# EAGLE board untitled (EAGLE 9.6.2)
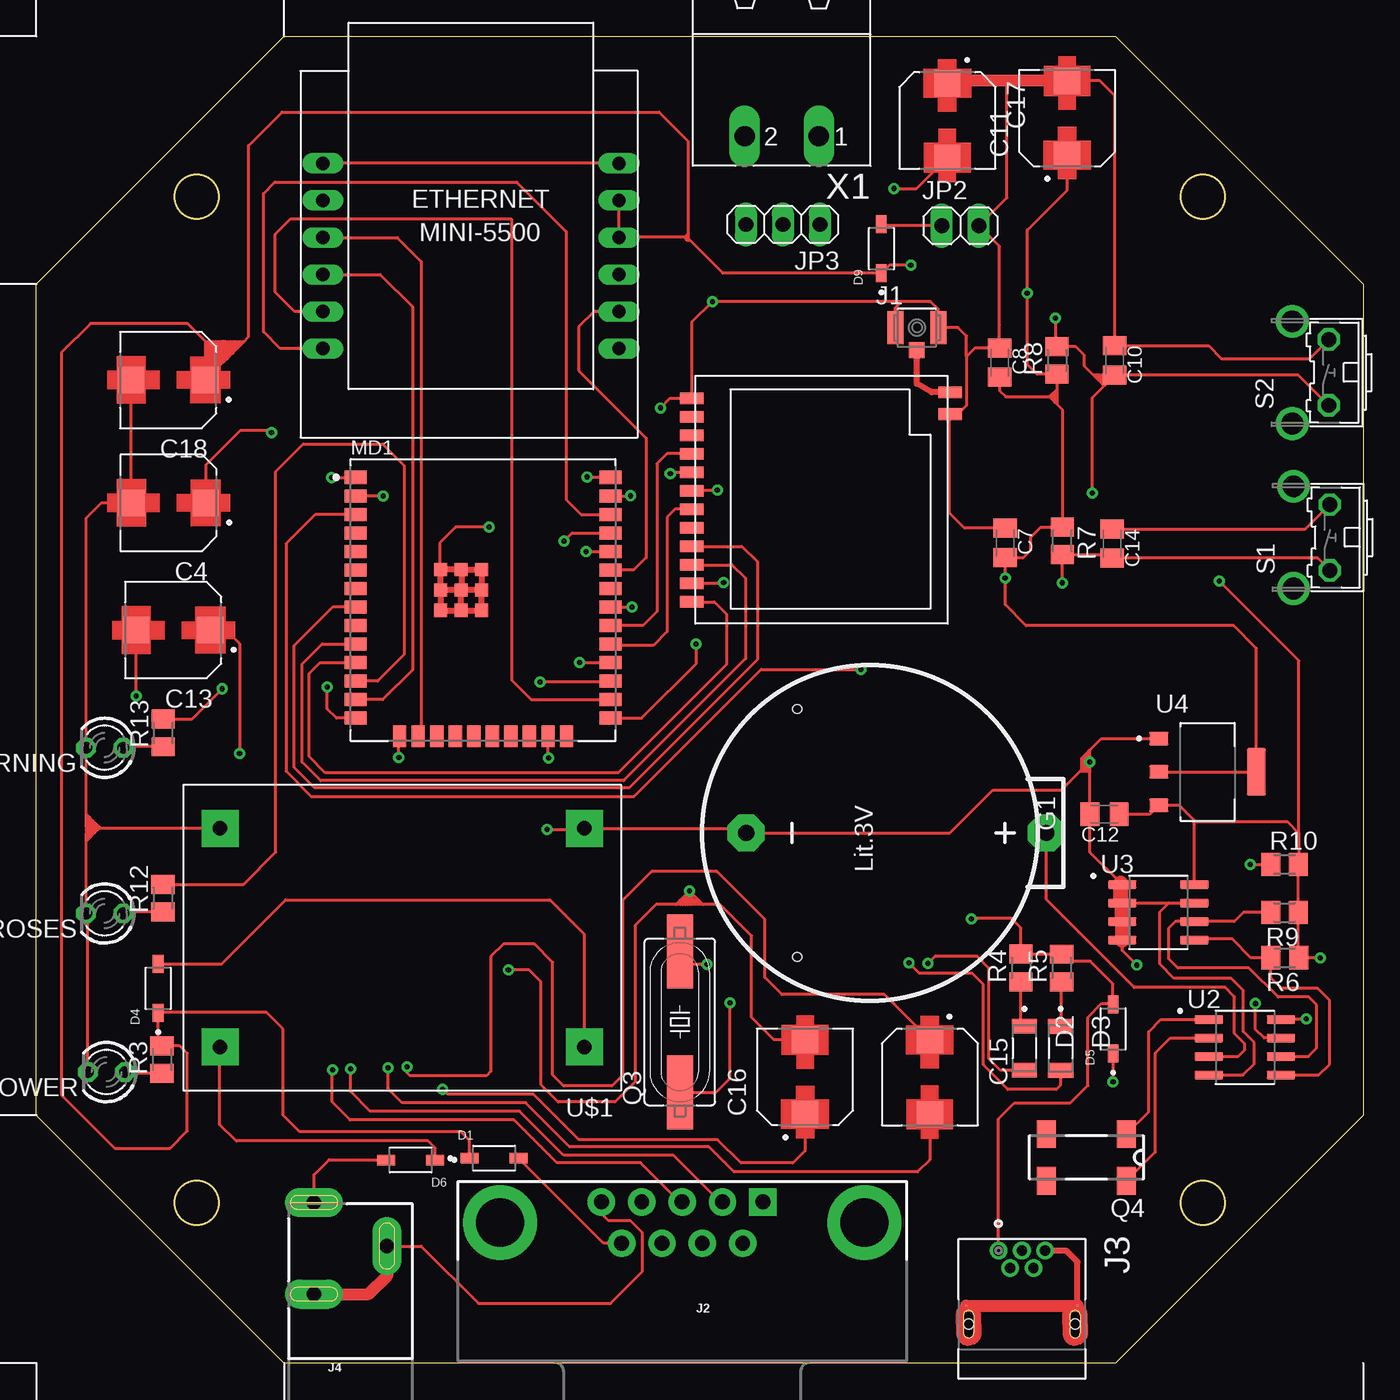
[diagram p0: board, top side]
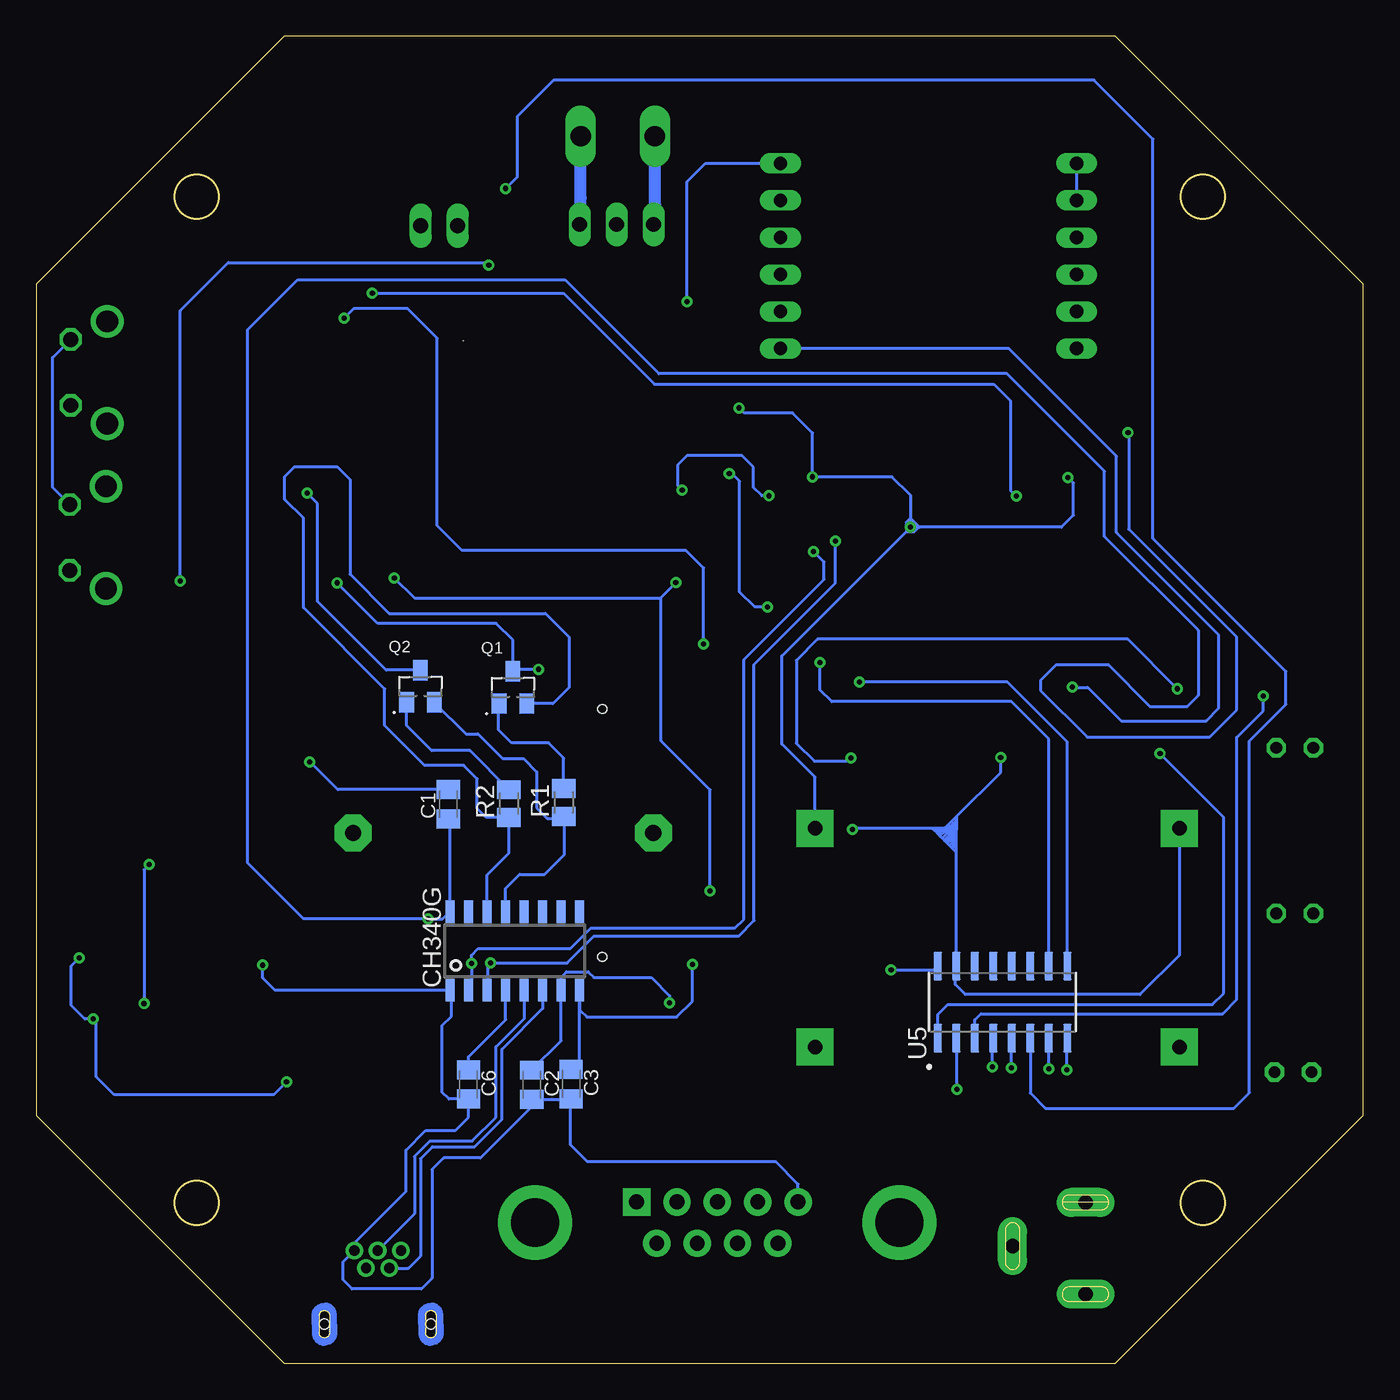
[diagram p1: board, bottom side, seen from below]

Size 91 x 91 mm. Coordinates in mm from the lower left corner, seen from the top.
Outline: 0,74 17,91 74,91 91,74 91,17 74,0 17,0 0,17 0,74
Outline: circle at 11,11 radius 1.5
Outline: circle at 80,11 radius 1.5
Outline: circle at 11,80 radius 1.5
Outline: circle at 80,80 radius 1.5
Copper layers (1*16): Top 0.035mm / dielectric 1.5mm / Bottom 0.035mm
Design rules "default": minimum track width 6mil, minimum drill 0.35mm, track to track 6mil, track to pad 6mil, pad to pad 6mil, via to via 6mil, smd to smd 6mil, copper to edge 40mil, drill to drill 6mil, minimum pad ring 10mil, minimum via ring 8mil, stop-mask expansion 4mil, vias tented up to drill 0mil, thermal gap 10mil
Net classes: 0 default: clearance 0.2 mm

## Footprints (pad centres in the part's own frame; a part is rotated, then mirrored left to right if it is on the bottom)
C0805K = smd 1.3 x 1.6: 1 -1,0; 2 1,0
CAP_EEEFK1H100V = smd 1.8 x 1.8: 1 -2.55,0; 2 2.55,0
SOD3715X145N = smd 1.21 x 0.73: A 1.68,0; C -1.68,0
LEDC3216X120N = smd 1.01 x 1.73: + -1.51,0; - 1.51,0
CR2032H = drill 1.118 pad 2.54 octagon: + 0,12.1; - 0,-8.5 | hole 0.6: -8.5,-5; 8.5,-5
HRS_U.FL-R-SMT(01) = smd 1.1 x 2.25: 1 -1.475,0; 2 1.475,0 | smd 1.05 x 1.1: 3 0,-1.55
DB9 = drill 1.016 pad 1.88 square: 1 -5.54,-1.42 | drill 1.016 pad 1.88: 2 -2.77,-1.42; 3 0,-1.42; 4 2.77,-1.42; 5 5.54,-1.42; 6 -4.15,1.42; 7 -1.38,1.42; 8 1.38,1.42; 9 4.15,1.42 | drill 3.302 pad 5.08: G1 -12.5,0; G2 12.5,0
TE_2172034-1 = drill 0.7: 1 -5.05,-1.6; 2 -3.85,-0.8; 3 -5.05,0; 4 -3.85,0.8; 5 -5.05,1.6 | smd 0.1 x 0.1: SH1 -1.27,3.81; SH2 -1.27,-3.81 | hole 0.7: 0,3.65; 0,-3.65
POWER_JACK_SLOT = drill 1 pad 2 long: GND@1 2.58,7.5; GND@2 7.58,10.8; PWR 2.58,13.8
1X02 = drill 1.016 long: 1 -1.27,0; 2 1.27,0
1X03 = drill 1.016 long: 1 -2.54,0; 2 0,0; 3 2.54,0
LORA-NICERF-V2 = smd 1.6 x 0.8: ANT 9.17,6.81; DIO0 -8.57,-5.03; DIO1 -8.57,-3.76; DIO2 -8.57,-2.49; GND -8.57,6.4; GND1 9.17,5.31; MISO -8.57,1.32; MOSI -8.57,0.05; NC -8.57,5.13; NC1 -8.57,3.86; NRST -8.57,-7.57; NSS -8.57,-1.22; SCK -8.57,2.59; VCC -8.57,-6.3
ESPRESSIF_SYSTEMS_ESP32-WROOM-32U_16MB_0 = smd 1.5 x 0.9: 1 -8.75,8.41; 2 -8.75,7.14; 3 -8.75,5.87; 4 -8.75,4.6; 5 -8.75,3.33; 6 -8.75,2.06; 7 -8.75,0.79; 8 -8.75,-0.48; 9 -8.75,-1.75; 10 -8.75,-3.02; 11 -8.75,-4.29; 12 -8.75,-5.56; 13 -8.75,-6.83; 14 -8.75,-8.1; 25 8.75,-8.1; 26 8.75,-6.83; 27 8.75,-5.56; 28 8.75,-4.29; 29 8.75,-3.02; 30 8.75,-1.75; 31 8.75,-0.48; 32 8.75,0.79; 33 8.75,2.06; 34 8.75,3.33; 35 8.75,4.6; 36 8.75,5.87; 37 8.75,7.14; 38 8.75,8.41 | smd 0.9 x 1.5: 15 -5.71,-9.35; 16 -4.44,-9.35; 17 -3.17,-9.35; 18 -1.9,-9.35; 19 -0.63,-9.35; 20 0.64,-9.35; 21 1.91,-9.35; 22 3.18,-9.35; 23 4.45,-9.35; 24 5.72,-9.35 | smd 0.9 x 0.9: 39 -2.9,2.09; 39-2 -1.5,0.69; 39-3 -1.5,2.09; 39-4 -0.1,2.09; 39-5 -0.1,-0.71; 39-6 -1.5,-0.71; 39-7 -2.9,-0.71; 39-8 -0.1,0.69; 39-9 -2.9,0.69
LED3MM = drill 0.813 octagon: A -1.27,0; K 1.27,0
SOT95P240X120-3N = smd 1 x 1.4: 1 -0.95,-1.1; 2 0.95,-1.1; 3 0,1.1
SM49 = smd 5.08 x 1.778: 1 -4.826,0; 2 4.826,0
MC-306 = smd 1.3 x 1.9: 1 -2.75,-1.6; 2 2.75,-1.6; 3 2.75,1.6; 4 -2.75,1.6
M0805 = smd 1.3 x 1.6: 1 -0.95,0; 2 0.95,0
B3F-31XX = drill 1.016 octagon: 1 -2.261,-1.245; 2 2.261,-1.245 | drill 1.499 pad 2.159: 3 -3.505,1.245; 4 3.505,1.245
SOIC127P600X175-8N = smd 1.97 x 0.59: 1 -2.475,1.905; 2 -2.475,0.635; 3 -2.475,-0.635; 4 -2.475,-1.905; 5 2.475,-1.905; 6 2.475,-0.635; 7 2.475,0.635; 8 2.475,1.905
SOT229P700X180-4N = smd 1.31 x 0.93: 1 -3.345,2.29; 2 -3.345,0; 3 -3.345,-2.29 | smd 1.31 x 3.24: 4 3.345,0
SOIC127P600X175-16N = smd 1.97 x 0.59: 1 -2.475,4.445; 2 -2.475,3.175; 3 -2.475,1.905; 4 -2.475,0.635; 5 -2.475,-0.635; 6 -2.475,-1.905; 7 -2.475,-3.175; 8 -2.475,-4.445; 9 2.475,-4.445; 10 2.475,-3.175; 11 2.475,-1.905; 12 2.475,-0.635; 13 2.475,0.635; 14 2.475,1.905; 15 2.475,3.175; 16 2.475,4.445
STEPDOWN_SY8205 = drill 1 pad 2.54 square: IN_GND 18,-2.5; IN_VCC 3,-2.5; OUT_GND 18,-27.5; OUT_VCC 3,-27.5
SOIC16 = smd 0.635 x 1.524: 1 -4.445,-2.695; 2 -3.175,-2.695; 3 -1.905,-2.695; 4 -0.635,-2.695; 5 0.635,-2.695; 6 1.905,-2.695; 7 3.175,-2.695; 8 4.445,-2.695; 9 4.445,2.695; 10 3.175,2.695; 11 1.905,2.695; 12 0.635,2.695; 13 -0.635,2.695; 14 -1.905,2.695; 15 -3.175,2.695; 16 -4.445,2.695
MINI_W5500 = drill 0.914 long: 3V3 21.844,-8.89; 3V3.2 21.844,-11.43; CS 1.524,-16.51; GND 1.524,-6.35; GND.2 1.524,-8.89; GND.3 21.844,-6.35; INT 1.524,-19.05; MISO 21.844,-19.05; MOSI 1.524,-11.43; NC 21.844,-13.97; RST 21.844,-16.51; SCLK 1.524,-13.97
MSTBA2 = drill 1.397 long: 1 -2.54,5.08; 2 2.54,5.08

## Placement (x,y rotation side)
C1  1uF  [C0805K]  62.74,38.33 90 bottom
C2  22pF  [C0805K]  57.03,19.09 270 bottom
C3  22pF  [C0805K]  54.33,19.14 270 bottom
C4  10uf/50V  [CAP_EEEFK1H100V]  9.06,59.01 180 top
C6  100nF  [C0805K]  61.36,19.11 270 bottom
C7  10uF  [C0805K]  66.44,56.26 270 top
C8  100nF  [C0805K]  66.06,68.62 270 top
C10  100nF  [C0805K]  73.96,68.78 270 top
C11  10uf/50V  [CAP_EEEFK1H100V]  70.7,85.4 90 top
C12  1uF  [C0805K]  73.27,37.64 180 top
C13  10uf/50V  [CAP_EEEFK1H100V]  9.39,50.28 180 top
C14  100nF  [C0805K]  73.79,56.21 270 top
C15  10uf/50V  [CAP_EEEFK1H100V]  61.28,19.62 270 top
C16  10uf/50V  [CAP_EEEFK1H100V]  52.72,19.63 90 top
C17  10uf/50V  [CAP_EEEFK1H100V]  62.49,85.23 270 top
C18  10uf/50V  [CAP_EEEFK1H100V]  9.04,67.43 180 top
D1  1N5819HW-7  [SOD3715X145N]  31.39,14.05 0 top
D2  Tx  [LEDC3216X120N]  67.76,21.6 270 top
D3  Rx  [LEDC3216X120N]  70.25,21.59 270 top
D4  1N5819HW-7  [SOD3715X145N]  8.35,25.7 90 top
D5  1N5819HW-7  [SOD3715X145N]  73.85,22.92 90 top
D6  1N5819HW-7  [SOD3715X145N]  25.67,13.93 180 top
D9  1N5819HW-7  [SOD3715X145N]  57.96,76.44 90 top
G1  CR2032H  [CR2032H]  57.18,36.36 270 top
J1  U.FL-R-SMT(01)  [HRS_U.FL-R-SMT(01)]  60.39,71.02 0 top
J2  [DB9]  44.29,9.63 180 top
J3  2172034-1  [TE_2172034-1]  67.6,2.67 270 top
J4  POWER_JACKSLT  [POWER_JACK_SLOT]  16.46,-2.78 0 top
JP2  [1X02]  63.38,78.01 0 top
JP3  [1X03]  51.2,78.11 180 top
LORA-NICERF-V1  [LORA-NICERF-V2]  53.51,59.78 0 top
MD1  ESPRESSIF_SYSTEMS_ESP32-WROOM-32U_16MBESPRESSIF_SYSTEMS_ESP32-WROOM-32U_16MB_0_0  [ESPRESSIF_SYSTEMS_ESP32-WROOM-32U_16MB_0]  30.63,52.34 0 top
POWER  TLLY4400  [LED3MM]  4.8,19.96 180 top
PROSES  TLLY4400  [LED3MM]  4.68,30.84 180 top
Q1  MMBT3904  [SOT95P240X120-3N]  58.32,46.34 0 bottom
Q2  MMBT3904  [SOT95P240X120-3N]  64.66,46.42 0 bottom
Q3  12MHz  [SM49]  44.14,23.4 90 top
Q4  MC-306  [MC-306]  72.02,14.11 180 top
R1  10K  [M0805]  54.83,38.45 90 bottom
R2  10K  [M0805]  58.59,38.38 90 bottom
R3  1K  [M0805]  8.61,20.81 90 top
R4  1K  [M0805]  67.53,27.11 90 top
R5  1K  [M0805]  70.32,27.1 90 top
R6  10K  [M0805]  85.64,27.81 180 top
R7  10K  [M0805]  70.37,56.39 270 top
R8  10K  [M0805]  70,68.77 90 top
R9  10K  [M0805]  85.62,30.91 180 top
R10  10K  [M0805]  85.61,34.2 0 top
R12  1K  [M0805]  8.67,31.89 90 top
R13  1K  [M0805]  8.69,43.23 90 top
S1  [B3F-31XX]  87.47,56.63 90 top
S2  [B3F-31XX]  87.4,67.95 90 top
U2  DS1307Z+  [SOIC127P600X175-8N]  82.9,21.66 0 top
U3  MAX3444EASA  [SOIC127P600X175-8N]  76.95,30.92 0 top
U4  AMS1117  [SOT229P700X180-4N]  80.34,40.55 0 top
U5  MAX232CSE  [SOIC127P600X175-16N]  24.73,24.76 90 bottom
U$1  STEPDOWN_SY8205  [STEPDOWN_SY8205]  10.09,18.68 90 top
U$2  CH340G  [SOIC16]  58.18,28.27 0 bottom
U$3  MINI_W5500  [MINI_W5500]  18.12,88.64 0 top
WARNING  TLLY4400  [LED3MM]  4.68,42.21 180 top
X1  MSTBA2  [MSTBA2]  51.12,89.24 180 top

## Library data of the parts
C1-C3 C6-C8 C10 C12 C14 = rcl; SPICEPREFIX: C
C4 C11 C13 C15-C18 = EEEFK1H100V; AVAILABILITY: In Stock; DESCRIPTION: CAP ALUM 10UF 20% 50V SMD; MF: Panasonic; MP: EEEFK1H100V; PACKAGE: RADIAL-2 Panasonic; PRICE: None; PURCHASE-URL: https://pricing.snapeda.com/search/part/EEEFK1H100V/?ref=eda
D1 D4-D6 D9 = 1N5819HW-7; AVAILABILITY: In Stock; DESCRIPTION: Diode Schottky 40 V 1A Surface Mount SOD-123; MF: Diodes Inc.; MP: 1N5819HW-7; PACKAGE: SOD-123 Fairchild Semiconductor; PRICE: None; PURCHASE-URL: https://pricing.snapeda.com/search/part/1N5819HW-7/?ref=eda
D2 D3 = LHN974_RED_LED_1206; AVAILABILITY: Not in stock; DESCRIPTION: 2.6 V Red LED SMD; MF: Osram; MP: LHN974 RED LED 1206; PACKAGE: None; PRICE: None
G1 = battery_cr2032
J1 = U.FL-R-SMT_01_; AVAILABILITY: In Stock; DESCRIPTION: U.FL (UMCC) Connector Receptacle, Male Pin 50Ohm Surface Mount Solder. RF Connectors / Coaxial Connectors; MF: Hirose; MP: U.FL-R-SMT(01); PACKAGE: None; PRICE: None; PURCHASE-URL: https://pricing.snapeda.com/search/part/U.FL-R-SMT(01)/?ref=eda
J2 = SparkFun-Connectors; PROD_ID: CONN-08194
J3 = 2172034-1; AVAILABILITY: In Stock; COMMENT: 2172034-1; DESCRIPTION: Conn Mini USB Type B RCP 5 POS 0.8mm Solder RA Thru-Hole 5 Terminal 1 Port Box/Tray; EU_ROHS_COMPLIANCE: Compliant; MF: TE Connectivity; MP: 2172034-1; PACKAGE: None; PRICE: None; PURCHASE-URL: https://pricing.snapeda.com/search/part/2172034-1/?ref=eda
J4 = SparkFun-Connectors; PROD_ID: PRT-00119
JP2 JP3 = pinhead
LORA-NICERF-V1 = LORA-NICERF-V2
MD1 = Espressif Systems - ESP32-WROOM-32U (16MB); AUTOMOTIVE: No; BANDWIDTH: 72MHz; CENTROID_NOT_SPECIFIED: No; DATASHEET: https://www.espressif.com/sites/default/files/documentation/esp32-wroom-32d_esp32-wroom-32u_datasheet_en.pdf; DATA_RATE: 150Mbits/s; DEVICE_CLASS_L1: Integrated Circuits (ICs); DEVICE_CLASS_L2: RF Semiconductors and Devices; DEVICE_CLASS_L3: Transceivers; DIGIKEY_DESCRIPTION: RX TXRX MODULE WIFI U.FL SMD; DIGIKEY_PART_NUMBER: 1904-1028-1-ND; FOOTPRINT_VARIANT_NAME_0: Recommended_Land_Pattern; HEIGHT: 3.35mm; INTERFACE: I2C,SPI,UART,Ethernet,I2S,Other; LEAD_FREE: Yes; MAX_FREQUENCY: 2484MHz; MAX_SUPPLY_VOLTAGE: 3.6V; MF: Espressif Systems; MFG_PACKAGE_IDENT: 0; MFG_PACKAGE_IDENT_DATE: 0; MFG_PACKAGE_IDENT_REV: 0; MIN_SUPPLY_VOLTAGE: 3V; MOUSER_PART_NUMBER: 356-ES32WROOM32U16MB; MPN: ESP32-WROOM-32U (16MB); NOMINAL_SUPPLY_CURRENT: 0.5A; NUMBER_OF_ADC_CHANNELS: 16; NUMBER_OF_GPIO: 26; PACKAGE: BT_MODULE; PREFIX: MD; ROHS: Yes; SENSITIVITY: -98dBm; TEMPERATURE_RANGE_HIGH: +85°C; TEMPERATURE_RANGE_LOW: -40°C; VERIFICATION_VERSION: 0.0.0.3
POWER PROSES WARNING = led; MF: VISHAY SEMICONDUCTOR; OC_FARNELL: 1612439
Q1 Q2 = MMBT3904; AVAILABILITY: Not in stock; DESCRIPTION: SMD Transistor MMBT3904 SOT-23 SMD DIOTEC; MF: STMicroelectronics; MP: MMBT3904; PACKAGE: SOT-23 ON; PRICE: None
Q3 = adafruit; OC_FARNELL: unknown; OC_NEWARK: unknown
Q4 = crystal; MPN: MC-306 60.0KHZ 100PPM ,12.5PF; OC_FARNELL: 1278040; OC_NEWARK: 31M5576
R1-R10 R12 R13 = adafruit
S1 S2 = switch-omron; MPN: B3F-3100; OC_FARNELL: 959704; OC_NEWARK: 36M3582
U2 = DS1307Z_; AVAILABILITY: In Stock; DESCRIPTION: Real Time Clock (RTC) IC Clock/Calendar 56B I²C, 2-Wire Serial 8-SOIC (0.154, 3.90mm Width); MF: Maxim Integrated; MP: DS1307Z; PACKAGE: SOIC-8 Maxim; PRICE: None; PURCHASE-URL: https://pricing.snapeda.com/search/part/DS1307Z/?ref=eda
U3 = MAX3444EASA; AVAILABILITY: In Stock; DESCRIPTION: Interface IC - transceivers Maxim Integrated MAX3444EASA+ J1708 1/1 SOIC 8 N; MF: Maxim Integrated; MP: MAX3444EASA+; PACKAGE: SOIC-8 Maxim; PRICE: None; PURCHASE-URL: https://pricing.snapeda.com/search/part/MAX3444EASA+/?ref=eda
U4 = AMS1117; AVAILABILITY: Not in stock; DESCRIPTION: 1A LOW DROPOUT VOLTAGE REGULATOR SOT-223; MF: Advanced Monolithic Systems; MP: AMS1117; PACKAGE: SOT-223 Seeed Technology; PRICE: None
U5 = MAX232CSE; AVAILABILITY: In Stock; DESCRIPTION: 2/2 Transceiver Full RS232 16-SOIC; MF: Maxim Integrated; MP: MAX232CSE; PACKAGE: SOIC-16 Maxim Integrated; PRICE: None; PURCHASE-URL: https://pricing.snapeda.com/search/part/MAX232CSE/?ref=eda
U$1 = STEPDOWN_SY8205
U$2 = usb-serial
U$3 = ethernet-mikroavr
X1 = con-phoenix-508; MF: FARNELL; MPN: 1757242; OC_FARNELL: 3705171; OC_NEWARK: 71C4161

## Nets
3V3: C7.2 C8.2 C11.1 C16.2 LORA-NICERF-V1.VCC MD1.2 R7.1 R8.1 U4.2 U4.4 U5.16
ANT: J1.3 LORA-NICERF-V1.ANT
CLK: MD1.20
CMD: MD1.19
DTR: Q2.2 R1.1 U$2.13
EN: C14.2 MD1.3 Q1.3 R7.2 S1.1
GND: C1.2 C2.2 C3.2 C4.2 C6.2 C7.1 C8.1 C10.1 C11.2 C12.2 C14.1 C17.1 C18.2 G1.- J1.1 J1.2 J2.5 J3.5 J3.SH1 J3.SH2 J4.GND@1 J4.GND@2 JP2.2 LORA-NICERF-V1.GND LORA-NICERF-V1.GND1 MD1.1 MD1.15 MD1.38 MD1.39 MD1.39-2 MD1.39-3 MD1.39-4 MD1.39-5 MD1.39-6 MD1.39-7 MD1.39-8 MD1.39-9 POWER.K PROSES.K S1.2 S2.2 U2.4 U3.1 U3.2 U3.3 U3.4 U3.7 U4.1 U5.15 U$1.IN_GND U$1.OUT_GND U$2.1 U$3.GND U$3.GND.2 U$3.GND.3 WARNING.K
INT_LAN: MD1.36 U$3.INT
IO0: C10.2 MD1.25 Q2.3 R8.2 S2.1
IO34: MD1.6
IO35: MD1.7
LED_PROSES: MD1.12 R12.2
LED_WARNING: MD1.23 R13.2
LORA_DI0: LORA-NICERF-V1.DIO0 MD1.10
LORA_DI1: LORA-NICERF-V1.DIO1 MD1.8
MISO_HSPI: MD1.14 U$3.MISO
MISO_VSPI: LORA-NICERF-V1.MOSI MD1.37
MOSI_HSPI: MD1.16 U$3.MOSI
MOSI_VSPI: LORA-NICERF-V1.MISO MD1.31
N$1: C2.1 Q3.1 U$2.7
N$2: C3.1 Q3.2 U$2.8
N$3: POWER.A R3.1
N$4: Q1.1 R1.2
N$5: Q2.1 R2.2
N$6: Q4.1 U2.1
N$7: Q4.4 U2.2
N$8: D2.+ R4.1
N$9: D3.+ R5.1
N$10: C13.1 U5.1
N$11: D4.A U$1.OUT_VCC
N$12: C6.1 U$2.4
N$13: JP3.1 X1.1
N$14: C13.2 U5.3
N$15: G1.+ U2.3
N$16: JP3.3 X1.2
N$17: D9.A JP2.1
N$18: R10.1 U2.7
N$19: C15.1 U5.4
N$20: D1.A J2.9
N$23: D6.A J4.PWR
N$24: C15.2 U5.5
N$25: PROSES.A R12.1
N$26: C16.1 U5.2
N$27: C17.2 U5.6
N$28: R13.1 WARNING.A
NC: MD1.32
OUT+: C12.1 C18.1 D1.C D4.C D5.C D9.C R3.2 R6.1 R9.1 R10.2 U2.8 U3.8 U4.3 U$3.3V3 U$3.3V3.2
R2IN: J2.3 U5.8
RST_LAN: MD1.33 U$3.RST
RST_LORA: LORA-NICERF-V1.NRST MD1.11
RTS: Q1.2 R2.1 U$2.14
RX: D3.- MD1.35 U$2.3
RX_DB9: MD1.27 U5.9
SCK_HSPI: MD1.13 U$3.SCLK
SCK_VSPI: LORA-NICERF-V1.SCK MD1.30
SCL: R9.2 U2.6 U3.6
SD0: MD1.21
SD1: MD1.22
SD2: MD1.17
SD3: MD1.18
SDA: R6.2 U2.5 U3.5
SENSOR_VN: MD1.5
SENSOR_VP: MD1.4
SS_LAN_CONV: MD1.26 U$3.CS
SS_LORA: LORA-NICERF-V1.NSS MD1.29
T2OUT: J2.2 U5.7
TX: D2.- MD1.34 U$2.2
TX_DB9: MD1.28 U5.10
USB_N: J3.2 U$2.6
USB_P: J3.3 U$2.5
VCC: C1.1 C4.1 D5.A J3.1 R4.2 R5.2 U$2.16
VCC_DB9: D6.C U$1.IN_VCC

## Tracks (layer width: path | path; a pad name or v marks a point on that pad's centre or on a via)
3V3  (via drill 0.35)
  Top 0.2: C8.2 66.06,66.71 66.48,66.28 69.49,66.28 | 70.02,66.81 69.71,66.5 | 69.71,66.5 69.65,66.44 | 70.02,66.81 70.02,67.8 R8.1 68.63,67.82 67.96,68.49 v67.96,73.39 67.96,77.72 70.7,80.46 C11.1 | U4.2 U4.4 83.68,49.03 82.12,50.59 67.88,50.59 66.45,52.02 v66.45,53.86 66.45,54.9 66.82,55.26 | C7.2 66.82,55.26 | 66.82,55.26 67.7,55.26 68.2,55.76 68.2,56.66 68.88,57.34 R7.1 70.37,65.4 70.02,65.75 | 69.49,66.28 69.54,66.23 | 69.54,66.23 69.71,66.06 | 69.71,66.06 69.86,65.91 | 69.86,65.91 70.02,65.75 | C16.2 50.58,22.18 49.05,23.7 49.05,29.3 46.9,31.45 45.74,31.45 | 45.74,31.45 44.9,31.45 | 44.9,31.45 44.69,31.45 | 44.69,31.45 44.5,31.45 | 44.5,31.45 44.32,31.45 | 44.32,31.45 44.19,31.45 | 44.19,31.45 43.85,31.45 | 43.85,31.45 42.49,31.45 41.07,30.03 41.07,19.29 39.68,17.9 35.79,17.9 34.6,19.09 34.6,26.16 33.81,26.96 32.39,26.96 v32.37,26.98 | 44.9,31.45 44.8,31.55 44.8,31.76 | 44.8,31.76 v44.8,32.39 | v47.14,53.53 47.1,53.48 LORA-NICERF-V1.VCC | v23.79,59.47 21.9,59.47 MD1.2 | 70.02,65.75 70.02,66.26 | 70.02,66.26 70.02,66.44 | 70.02,66.44 70.02,66.55 | 70.02,66.55 70.02,66.81 | 69.49,66.28 69.65,66.44 | 70.02,66.44 69.91,66.44 | 70.02,66.55 69.91,66.44 | 69.91,66.44 69.65,66.44 | 69.54,66.23 70,66.23 70.02,66.26 | 69.71,66.5 69.71,66.06 | 69.91,66.44 69.86,66.38 69.86,65.91 | v44.8,32.39 44.36,31.96 | 44.36,31.96 44.27,31.87 | 44.27,31.87 44.14,31.73 | 44.14,31.73 44.08,31.68 | 44.08,31.68 43.85,31.45 | 44.08,31.68 44.08,31.56 44.19,31.45 | 44.14,31.73 44.32,31.55 44.32,31.45 | 44.27,31.87 44.5,31.64 44.5,31.45 | 44.36,31.96 44.48,31.83 | 44.48,31.83 44.57,31.75 | 44.57,31.75 44.69,31.63 44.69,31.59 | 44.69,31.59 44.69,31.45
  Top 0.2: v44.8,32.39 44.8,31.97 | 44.57,31.75 44.8,31.97 | v44.8,32.39 44.8,32.14 44.48,31.83 | v44.8,32.39 45.41,31.78 | 45.41,31.78 45.55,31.64 | 45.55,31.64 45.74,31.45 | 44.69,31.59 45.51,31.59 45.55,31.64 | 44.8,31.76 45.15,31.76 | 45.15,31.76 45.4,31.76 45.41,31.78 | 44.8,31.97 44.94,31.97 | 44.94,31.97 45.15,31.76 | v44.8,32.39 44.94,32.25 44.94,31.97
  Bottom 0.2: v32.37,26.98 29.43,26.98 U5.16 | v44.8,32.39 44.8,39.33 48.15,42.67 48.15,52.53 v47.14,53.53 48.21,52.47 65.06,52.47 v66.45,53.86 | v67.96,73.39 54.85,73.39 48.61,67.15 25.32,67.15 24.19,66.02 24.19,59.86 v23.79,59.47
ANT
  Top 0.406: LORA-NICERF-V1.ANT 61.4,66.59 60.39,67.17 J1.3
DTR
  Bottom 0.2: U$2.13 58.82,32.56 57.85,33.53 56.14,33.53 54.79,34.88 54.79,37.45 R1.1 54.96,37.37 55.97,37.37 56.68,38.08 56.68,40.56 57.58,41.46 59.02,41.46 60.72,43.16 61.54,43.16 Q2.2
EN  (via drill 0.35)
  Top 0.2: S1.1 87.88,55.21 C14.2 73.56,55.45 R7.2 v70.37,53.52 | MD1.3 19.13,58.21 17.12,56.2 17.12,40.6 18.86,38.86 40.98,38.86 49.7,47.59 v56.55,47.59
  Bottom 0.2: Q1.3 58.32,47.59 | 58.32,47.59 58.32,49.6 59.45,50.73 67.59,50.73 v70.37,53.52 | v56.55,47.59 58.32,47.59
GND  (via drill 0.35)
  Top 0.2: 66.57,87.95 66.57,79.94 JP2.2 66.06,76.6 C8.1 | C11.2 70.72,87.96 72.94,87.96 73.96,86.95 C10.1 80.41,69.78 81.28,68.91 87.34,68.91 S2.2 | C8.1 66.06,71.22 | C8.1 64.38,69.62 63.8,69.05 | 63.8,69.05 63.8,65.69 63.21,65.09 LORA-NICERF-V1.GND1 62.64,65.05 62.64,58.29 63.67,57.26 C7.1 | J1.1 58.91,72.39 59.34,72.81 | 59.34,72.81 61.33,72.81 61.83,72.31 61.83,71.06 J1.2 63.22,71.03 63.8,70.45 63.8,69.05 | 72.27,40.57 C12.2 72.27,35.04 74.38,32.92 U3.1 | 72.27,40.57 72.27,40.67 | 72.27,40.67 72.27,40.87 | v72.27,41.23 72.27,41.26 | 72.27,41.26 72.27,41.35 | 72.27,41.35 72.27,41.65 | 72.27,41.65 72.27,42.05 | U4.1 73.06,42.84 72.27,42.05 | U$3.GND U$3.GND.3 40,82.32 | POWER.K 3.53,30.71 PROSES.K 3.41,35.78 | 3.41,35.78 3.41,36 | 3.41,36 3.41,36.3 | 3.41,36.59 3.41,36.3 | 3.41,36.8 3.41,36.59 | 3.41,36.8 3.41,36.99 | 3.41,36.99 3.41,37.19 | 3.41,37.19 3.41,37.37 | 3.41,37.37 3.41,37.66 | 3.41,37.66 WARNING.K 3.41,57.96 4.46,59.01 C4.2 6.49,59.03 C18.2 | U$1.IN_GND 4.38,36.68 | 4.38,36.68 4.29,36.77 | 4.29,36.77 4.17,36.89 | 4.17,36.89 4.13,36.94 | 4.13,36.94 4.04,37.02 | 4.04,37.02 3.88,37.19 | 3.69,37.37 3.62,37.45 | 3.62,37.45 3.41,37.66 | 45.71,66.21 LORA-NICERF-V1.GND | J4.GND@2 26.39,8.02 30.31,4.09 39.39,4.09 41.57,6.28 41.57,8.94 40.73,9.78 39.21,9.78 38.75,10.23 J2.5 | C14.1 87.03,57.21 S1.2 | 59.34,72.81 v46.37,72.81 44.94,71.39 LORA-NICERF-V1.GND | U2.4 82.77,19.76 83.53,20.52 83.53,21.99 82.78,22.75 82.78,25.57 81.95,26.4 78.03,26.4 77.06,27.36 77.06,30.95 77.68,31.56 78.74,31.56 | 78.74,31.56 U3.7 | v75.48,27.3 74.48,28.3 U3.4 | v35.02,36.6 37.51,36.6 U$1.OUT_GND 48.38,36.68 48.7,36.36 | G1.- 48.7,36.36
  Top 0.2: 48.7,36.36 62.67,36.36 65.61,39.3 70.31,39.3 71.62,40.61 | 71.62,40.61 71.71,40.7 | 71.71,40.7 71.89,40.88 | 71.99,40.98 72.04,41.03 | 72.04,41.03 72.27,41.26 | v24.86,41.54 24.86,42.93 MD1.15 | v31.04,57.33 28.76,57.33 27.67,56.24 27.67,54.5 MD1.39 | v20.24,60.75 v20.25,60.75 MD1.1 | v37.76,60.79 39.35,60.79 MD1.38 | v42.81,65.52 43.48,66.18 LORA-NICERF-V1.GND | 4.38,36.68 4.31,36.68 4.22,36.59 | 4.22,36.59 4.01,36.39 | 4.01,36.39 3.62,35.99 | 3.62,35.99 3.41,35.78 | 3.62,37.45 3.62,36.69 | 3.62,36.69 3.62,36.12 | 3.62,36.12 3.62,35.99 | 3.41,37.37 3.69,37.37 | 3.69,37.37 3.88,37.19 | 3.41,37.19 3.88,37.19 | 3.41,36.99 4.01,36.99 4.04,37.02 | 3.41,36.8 3.99,36.8 4.13,36.94 | 3.41,36.59 4.04,36.59 | 4.04,36.59 4.22,36.59 | 4.17,36.89 4.04,36.76 4.04,36.59 | 3.62,36.69 4.21,36.69 4.29,36.77 | 3.41,36.59 3.61,36.39 3.83,36.39 | 3.83,36.39 4.01,36.39 | 3.41,36.3 3.74,36.3 3.83,36.39 | 3.41,36.3 3.59,36.12 3.62,36.12 | 3.41,36 3.5,36 3.62,36.12 | U3.2 78.74,31.56 | 71.62,40.61 71.89,40.61 | 71.89,40.61 72.02,40.61 | 72.02,40.61 72.21,40.61 72.27,40.67 | 71.71,40.7 71.71,41.14 | 71.71,41.14 71.71,41.22 | 71.71,41.22 71.71,41.49 | 72.27,42.05 72.04,41.83 | 72.04,41.83 71.94,41.72 | 71.94,41.72 71.82,41.6 | 71.82,41.6 71.71,41.49 | 71.89,40.61 71.89,40.88 | 71.89,40.88 71.99,40.98 | 72.02,40.61 71.99,40.65 71.99,40.98 | 72.27,40.57 72.04,40.8 | 72.04,41.03 72.04,41.01 | 72.06,41.03 72.04,41.03 | 72.04,40.8 72.2,40.8 72.27,40.87 | 72.06,41.03 72.04,41.01 | 72.04,41.01 72.04,40.88 | 72.04,40.88 72.04,40.8 | v72.27,41.23 72.06,41.03 | v72.27,41.23 72.27,40.87 | v72.27,41.23 72.27,41.11 72.04,40.88 | 71.71,41.14 71.87,40.98 71.99,40.98 | 71.71,41.22 71.85,41.22 72.04,41.03
  Top 0.2: 71.71,41.49 71.94,41.26 72.27,41.26 | 71.82,41.6 72.06,41.35 72.15,41.35 | 72.15,41.35 72.27,41.35 | 71.94,41.72 72.15,41.51 72.15,41.35 | 72.04,41.83 72.22,41.65 72.27,41.65
  Top 0.406: J3.SH1 71.41,6.94 70.63,7.72 J3.5 | 29.18,54.43 MD1.39-3 MD1.39 MD1.39-9 | 29.18,54.43 MD1.39-4 MD1.39-8 | MD1.39-8 MD1.39-2 | MD1.39-2 | MD1.39-2 MD1.39-9 | MD1.39-9 MD1.39-7 MD1.39-6 | MD1.39-6 MD1.39-5 MD1.39-8 | MD1.39-6 MD1.39-2 | MD1.39-2 29.18,53.09 29.18,54.43
  Top 0.813: J3.SH2 J3.SH1 | J4.GND@1 22.76,4.72 24.07,6.03 24.07,7.99 J4.GND@2 | C11.2 66.57,87.95 62.66,87.95 C17.1
  Top 1.016: U3.4 U3.3 U3.2 74.38,31.65 74.38,32.92
  Bottom 0.2: S1.2 89.88,60.06 89.88,68.97 S2.2 | 54.37,18.09 C2.2 57.03,17.58 60.55,14.06 63.07,14.06 63.86,13.27 63.86,5.82 64.59,5.09 69.35,5.09 69.98,5.72 69.98,6.93 J3.5 69.2,8.23 65.65,11.78 65.65,14.61 64.29,15.96 62.26,15.96 61.36,16.86 C6.2 62.7,18.11 63.16,18.57 63.16,23.17 62.54,23.8 62.54,25.48 U$2.1 74.63,25.58 75.48,26.43 v75.48,27.3 | 54.37,18.09 C3.2 | C1.2 70.33,39.34 72.23,41.23 v72.27,41.23 | J2.5 38.75,12.27 40.28,13.8 53.2,13.8 54.37,14.97 54.37,18.09 | 27.9,35.04 U5.15 27.97,27.17 27.97,25.96 27.28,25.27 15.3,25.27 12.59,27.98 U$1.IN_GND | 27.9,35.04 28.23,35.37 | 28.23,35.37 28.38,35.51 | 28.38,35.51 28.52,35.66 | 28.52,35.66 28.67,35.8 | 28.67,35.8 28.73,35.87 | 28.73,35.87 28.87,36.01 | 28.87,36.01 29.02,36.15 | 29.02,36.15 29.14,36.27 | 29.14,36.27 29.38,36.52 | 29.38,36.52 29.54,36.67 | 29.54,36.67 34.94,36.67 v35.02,36.6 | v46.37,72.81 46.37,81.03 45.1,82.29 U$3.GND.3 | 27.9,35.04 27.9,35.4 | 27.9,35.4 27.9,35.62 | 27.9,35.62 27.9,35.81 | 27.9,35.81 27.9,35.96 | 27.9,35.96 27.9,36.16 | 27.9,36.16 27.9,36.33 | 27.9,36.33 27.9,36.57 | 27.9,37.48 27.9,37.24 | 27.9,37.24 27.9,36.69 | 27.9,36.69 27.9,36.57 | v24.86,41.54 24.86,40.53 27.9,37.48 | U$3.GND.2 U$3.GND | U$1.OUT_GND 37.59,40.19 39.86,42.46 39.86,48.51 31.34,57.04 | 31.34,57.04 v31.04,57.33 | v31.04,57.33 30.75,57.33 | 30.75,57.33 30.48,57.33 | 30.48,57.33 30.42,57.33 | 30.42,57.33 20.69,57.33 19.87,58.16 19.87,60.37 v20.24,60.75 | 31.04,57.61 31.04,57.96 | 31.04,57.96 31.04,59.53 32.3,60.79 v37.76,60.79 37.76,63.79 39.13,65.17 42.46,65.17 v42.81,65.52 | 27.9,37.48 28.71,36.67 29.54,36.67 | 27.9,35.4 28.2,35.4 | 28.2,35.4 28.23,35.37
  Bottom 0.2: 27.98,35.62 28.27,35.62 28.38,35.51 | 27.9,35.81 28.37,35.81 28.52,35.66 | 27.9,35.62 27.98,35.62 | 27.98,35.62 28.2,35.4 | 27.9,35.96 28.51,35.96 28.67,35.8 | 27.9,36.16 28.44,36.16 28.73,35.87 | 27.9,36.33 28.55,36.33 28.87,36.01 | 28.73,36.43 29.02,36.15 | 27.9,36.57 28.04,36.43 28.16,36.43 | 27.9,36.69 28.45,36.69 | 28.84,36.57 28.72,36.69 28.45,36.69 | 28.84,36.57 29.14,36.27 | 27.9,37.24 28.12,37.02 | 28.12,37.02 28.45,36.69 | 28.03,36.57 28.16,36.43 | 28.16,36.43 28.73,36.43 | 27.9,36.69 28.03,36.57 | 28.03,36.57 28.84,36.57 | 28.12,37.02 28.12,36.65 28.03,36.57 | 29.38,36.52 28.82,36.52 28.73,36.43 | 31.04,57.96 30.69,57.61 | 30.42,57.33 30.65,57.56 | v31.04,57.33 30.81,57.56 30.65,57.56 | 30.65,57.56 30.69,57.61 | 30.69,57.61 31.04,57.61 | v31.04,57.33 31.04,57.61 | 30.65,57.56 30.75,57.47 30.75,57.33 | 31.04,57.96 31.28,57.72 | 31.28,57.72 31.34,57.66 31.34,57.51 | 31.34,57.51 31.34,57.31 | 31.34,57.31 31.34,57.04 | v31.04,57.33 31.22,57.51 31.34,57.51 | v31.04,57.33 31.04,57.49 31.28,57.72 | v31.04,57.33 31.32,57.33 31.34,57.31 | 31.34,57.04 31.06,57.04 | 31.06,57.04 30.78,57.04 30.7,57.12 | 30.7,57.12 30.48,57.33 | v31.04,57.33 31.06,57.31 31.06,57.24 | 31.06,57.24 31.06,57.04 | 30.7,57.12 30.95,57.12 31.06,57.24
INT_LAN
  Top 0.2: U$3.INT 16.73,69.59 15.57,70.75 15.57,80.22 16.36,81.01 32.94,81.01 36.33,77.61 36.33,59.23 37.36,58.2 39.36,58.2 MD1.36
IO0  (via drill 0.35)
  Top 0.2: 73.29,67.78 C10.2 73.99,67.78 | 73.29,67.78 73.12,67.78 | 72.92,67.78 72.5,67.78 | 72.5,67.78 71.9,68.38 71.9,69.14 71.31,69.72 R8.2 69.91,69.81 v69.91,71.68 | S2.1 86.55,67.78 73.99,67.78 | v72.43,59.68 72.43,66.22 73.3,67.08 | 73.3,67.08 73.99,67.78 | MD1.25 41.51,44.24 45.27,48 45.27,49.3 v45.24,49.33 | 72.5,67.78 72.71,67.57 | 72.71,67.57 72.81,67.47 | 72.81,67.47 72.9,67.38 | 72.9,67.38 73.03,67.25 | 73.03,67.25 73.2,67.08 73.3,67.08 | 72.71,67.57 72.92,67.78 | 72.92,67.78 73.12,67.78 | 72.81,67.47 73.12,67.78 | 72.9,67.38 72.9,67.4 73.14,67.64 | 73.14,67.64 73.29,67.78 | 73.03,67.25 73.14,67.35 73.14,67.64
  Bottom 0.2: Q2.3 67,47.52 71.71,52.24 71.71,58.95 v72.43,59.68 | v45.24,49.33 45.24,54.54 46.45,55.75 61.81,55.75 63.5,57.44 63.5,70.29 65.53,72.33 69.26,72.33 v69.91,71.68
LED_PROSES
  Top 0.2: 21.86,46.81 MD1.12 23.41,46.78 25.22,48.59 25.22,61.57 23.75,63.04 18.3,63.04 16.41,61.15 16.41,35.05 14.21,32.84 R12.2
LED_WARNING  (via drill 0.35)
  Top 0.2: v12.74,46.25 10.67,44.18 R13.2 | v35.13,41.51 35.08,41.56 MD1.23
  Bottom 0.2: v12.74,46.25 16.14,49.65 37.42,49.65 38.87,48.2 38.87,42.51 37.65,41.29 35.36,41.29 v35.13,41.51
LORA_DI0
  Top 0.2: LORA-NICERF-V1.DIO0 47.73,54.75 48.64,53.84 48.64,48.31 40.28,39.95 19.49,39.95 18.21,41.23 18.21,47.94 19.6,49.32 MD1.10
LORA_DI1
  Top 0.2: LORA-NICERF-V1.DIO1 48.38,56.02 49.45,54.96 49.45,48.25 40.65,39.46 19.09,39.46 17.68,40.86 17.68,49.2 20.36,51.88 21.86,51.88 MD1.8
MISO_HSPI  (via drill 0.35)
  Top 0.2: MD1.14 20.58,44.24 19.95,44.87 v19.95,46.37
  Bottom 0.2: v19.95,46.37 19.93,46.35 18.88,46.35 16.59,44.06 10.77,44.06 9.89,44.93 9.89,49.95 16.92,56.97 16.92,62.21 24.31,69.59 U$3.MISO
MISO_VSPI  (via drill 0.35)
  Top 0.2: MD1.37 v40.75,59.48 v40.76,59.49 | v46.7,59.89 46.65,59.83 LORA-NICERF-V1.MOSI
  Bottom 0.2: v40.76,59.49 41.24,59.49 41.82,60.06 41.82,61.45 42.6,62.24 46.39,62.24 47.02,61.61 47.02,60.2 v46.7,59.89
MOSI_HSPI
  Top 0.2: U$3.MOSI 24.74,77.21 26.39,75.56 26.39,43.19 MD1.16
MOSI_VSPI  (via drill 0.35)
  Top 0.2: MD1.31 v40.85,51.86 | v43.48,61.02 43.56,61.1 LORA-NICERF-V1.MISO
  Bottom 0.2: v40.85,51.86 41.73,51.86 42.77,52.9 42.77,60.49 43.39,61.11 v43.48,61.02
N$1  (via drill 0.35)
  Top 0.2: Q3.1 46.62,18.58 47.57,19.52 v47.57,24.71
  Bottom 0.2: C2.1 55.01,22.11 U$2.7 55.01,26.47 54.64,26.84 53.16,26.84 52.77,26.45 48.82,26.45 47.57,25.2 v47.57,24.71
N$2  (via drill 0.35)
  Top 0.2: v46,27.36 45.01,27.36 Q3.2
  Bottom 0.2: C3.1 53.74,20.72 U$2.8 53.74,24.23 53.24,23.73 47.09,23.73 46,24.82 v46,27.36
N$3
  Top 0.2: R3.1 6.17,19.86 POWER.A
N$4
  Bottom 0.2: R1.2 54.84,41.5 55.87,42.54 58.41,42.54 59.29,43.42 59.29,45.22 Q1.1
N$5
  Bottom 0.2: R2.2 61.26,42.01 63.89,42.01 65.61,43.72 Q2.1
N$6
  Top 0.2: Q4.1 76.3,17.23 76.3,22.73 77.13,23.56 U2.1
N$7
  Top 0.2: Q4.4 76.75,14.49 76.75,21.26 77.79,22.3 U2.2
N$8
  Top 0.2: D2.+ 67.53,23.34 R4.1
N$9
  Top 0.2: D3.+ 70.32,23.17 R5.1
N$10  (via drill 0.35)
  Top 0.2: C13.1 12.99,50.28 13.93,49.34 v13.93,41.8
  Bottom 0.2: U5.1 29.17,23.91 28.49,24.59 10.32,24.59 9.56,25.36 9.56,37.43 v13.93,41.8
N$11
  Top 0.2: D4.A 12.69,27.38 17.09,31.78 35.22,31.78 37.59,29.41 U$1.OUT_VCC
N$12
  Bottom 0.2: C6.1 61.36,21.01 58.82,23.55 U$2.4
N$13
  Bottom 0.813: X1.1 53.66,79.94 53.66,79.06 53.66,78.19 JP3.1
N$14  (via drill 0.35)
  Top 0.2: v6.84,45.74 C13.2
  Bottom 0.2: U5.3 26.63,23.54 26.21,23.97 9.63,23.97 8.66,24.94 8.66,42.93 6.84,44.74 v6.84,45.74
N$15
  Top 0.2: U2.3 82.43,21.02 82.89,21.48 82.89,21.9 82.19,22.6 82.19,25.12 81.55,25.76 75.31,25.76 69.28,31.79 G1.+
N$16
  Bottom 0.813: X1.2 48.58,80.48 48.58,79.52 48.58,78.19 JP3.3
N$17
  Top 0.2: 62.08,78.05 JP2.1 58.07,78.01 D9.A
N$18  (via drill 0.35)
  Top 0.2: U2.7 84.22,22.3 83.62,22.89 v83.62,24.66 | v83.25,34.2 R10.1
  Bottom 0.2: v83.25,34.2 83.62,33.84 v83.62,24.66
N$19  (via drill 0.35)
  Top 0.2: C15.1 58.17,25.28 51.13,25.28 49.97,26.44 49.97,30.42 46.67,33.72 42.19,33.72 40.21,31.74 40.21,19.74 39.48,19.01 36.16,19.01 35.41,19.76 35.41,27.49 34.15,28.74 32.03,28.74 31.17,27.88 31.17,20.01 30.87,19.71 25.62,19.71 25.42,19.91 25.42,20.32 v25.43,20.33
  Bottom 0.2: v25.43,20.33 25.43,22.23 U5.4
N$20
  Top 0.2: J2.9 38.91,8.21 D1.A
N$23
  Top 0.2: J4.PWR 19.04,12.91 20.07,13.95 23.97,13.95 D6.A
N$24  (via drill 0.35)
  Top 0.2: C15.2 61.28,13.96 60.44,13.11 47.86,13.11 46.14,14.83 36.58,14.83 33.56,17.85 25.08,17.85 24.13,18.81 v24.13,20.24
  Bottom 0.2: v24.13,20.24 24.13,22.25 U5.5
N$25
  Top 0.2: R12.1 6.05,30.94 PROSES.A
N$26  (via drill 0.35)
  Top 0.2: C16.1 52.72,14.55 51.89,13.72 48.33,13.72 46.73,15.32 37.21,15.32 34.09,18.44 28.21,18.44 v27.86,18.78
  Bottom 0.2: v27.86,18.78 27.86,22.25 U5.2
N$27  (via drill 0.35)
  Top 0.2: v58.82,80.57 60.38,80.57 C17.2
  Bottom 0.2: U5.6 22.82,18.53 21.78,17.48 8.85,17.48 7.79,18.55 7.79,42.68 5.28,45.19 5.28,47.44 14.41,56.56 14.41,83.97 18.45,88.01 55.51,88.01 58.02,85.5 58.02,81.35 v58.81,80.56 v58.82,80.57
N$28
  Top 0.2: R13.1 6.02,42.28 WARNING.A
OUT+  (via drill 0.35)
  Top 0.2: U3.8 79.43,37.14 | 79.43,37.14 79.43,37.23 78.39,38.26 U4.3 76.37,37.64 C12.1 | 79.43,37.14 85.81,37.14 86.61,36.34 | 86.61,36.34 86.61,34.25 R10.2 R9.1 86.56,27.83 R6.1 v88.06,27.8 | U$3.3V3 U$3.3V3.2 44.44,77.22 | 44.83,77.02 47.09,74.76 D9.C 58.52,75.32 v59.97,75.32 | 44.69,77.17 44.64,77.22 44.44,77.22 | C18.1 12.85,68.69 | 12.85,68.69 13.03,68.87 | 13.03,68.87 13.22,69.06 | 13.22,69.06 13.42,69.26 | 13.42,69.26 13.56,69.4 | 13.56,69.4 13.72,69.56 | 13.72,69.56 13.83,69.67 | 13.83,69.67 14.03,69.87 | 14.24,70.08 14.56,70.4 14.56,83.52 16.84,85.81 42.71,85.81 44.69,83.83 44.69,77.46 | 44.69,77.46 44.44,77.22 | 11.61,67.45 C18.1 | C18.1 11.59,68.87 | 11.59,68.87 11.59,69.08 | 11.59,69.08 11.59,69.26 | 11.59,69.26 11.59,69.42 | 11.59,69.42 11.59,69.58 | 11.59,69.58 11.59,69.73 | 11.59,69.73 11.59,69.87 | 11.59,69.87 11.59,70.03 | 11.59,70.03 11.59,70.08 | 11.59,70.08 10.37,71.31 3.72,71.31 1.71,69.3 1.71,18.39 5.36,14.74 9.16,14.74 10.34,15.92 10.34,21.24 9.81,21.77 8.62,21.77 R3.2 8.35,22.02 D4.C 8.37,24.04 15.79,24.04 16.92,22.91 16.92,17 18.07,15.86 29.13,15.86 29.71,15.28 D1.C | U2.8 85.41,23.61 v87.09,23.61 | D5.C v73.85,19.29 | 86.61,36.34 86.61,48.18 v81.14,53.65 | 13.96,70.08 14.24,70.08 | 11.59,69.87 11.81,69.87 | 11.81,69.87 12.12,69.87 | 12.12,69.87 12.3,69.87 | 12.3,69.87 12.51,69.87 | 12.51,69.87 12.71,69.87 | 13.1,69.87 13.4,69.87 | 13.47,69.87 13.9,69.87 | 13.9,69.87 14.03,69.87 | 14.03,69.87 14.1,69.94 | 14.1,69.94 14.24,70.08 | 11.59,69.73 11.82,69.73 | 11.82,69.73 12.6,69.73 | 12.6,69.73 13.03,69.73 | 13.03,69.73 13.77,69.73 13.83,69.67 | 11.59,69.58 13.71,69.58 13.72,69.56 | 11.59,69.42 13.54,69.42 13.56,69.4
  Top 0.2: 11.59,69.26 13.42,69.26 | 11.59,69.08 13.21,69.08 13.22,69.06 | 11.59,68.87 12.44,68.87 | 12.44,68.87 13.03,68.87 | 12.85,68.69 12.62,68.69 12.44,68.87 | 11.59,70.08 11.9,70.08 | 11.9,70.08 12.06,70.08 | 12.06,70.08 12.3,70.08 | 12.3,70.08 12.52,70.08 | 12.52,70.08 12.68,70.08 | 13.69,70.08 13.96,70.08 | 13.96,70.08 14.1,69.94 | 11.9,70.08 11.9,69.81 11.82,69.73 | 11.59,70.03 11.65,70.03 11.81,69.87 | 12.06,70.08 12.12,70.02 | 12.12,69.87 12.12,70.02 | 12.3,70.08 12.51,69.87 | 12.68,70.08 12.71,70.05 | 12.71,70.05 12.71,69.87 | 12.97,70.08 13.32,70.08 | 12.97,70.08 12.68,70.08 | 13.32,70.08 13.51,70.08 | 13.51,70.08 13.69,70.08 | 13.69,70.08 13.9,69.87 | 12.71,69.87 12.99,69.87 | 12.99,69.87 13.1,69.87 | 13.1,69.87 13.32,70.08 | 13.4,69.87 13.51,69.98 13.51,70.08 | 13.69,70.08 13.47,69.87 | 13.47,69.87 13.4,69.87 | 12.12,70.02 12.14,70.02 12.3,69.87 | 12.52,70.08 12.52,69.81 12.6,69.73 | 12.71,70.05 13.03,69.73 | 12.97,70.08 13.1,69.95 13.1,69.87 | 12.97,70.08 12.97,69.88 12.99,69.87 | 13.32,70.08 13.4,69.99 13.4,69.87 | 44.44,77.22 44.63,77.02 44.83,77.02 | 44.69,77.46 44.69,77.17 | 44.69,77.17 44.83,77.02
  Bottom 0.2: v88.06,27.8 88.63,27.23 88.63,24.55 87.69,23.61 v87.09,23.61 86.89,23.4 86.89,19.64 85.67,18.41 74.73,18.41 v73.85,19.29 | v81.14,53.65 81.14,72.19 77.84,75.48 60.13,75.48 v59.97,75.32
R2IN  (via drill 0.35)
  Top 0.2: v20.32,20.12 20.29,20.09 20.29,17.9 21.52,16.68 32.76,16.68 35.7,13.74 41.44,13.74 44.13,11.05 J2.3
  Bottom 0.2: v20.32,20.12 20.32,22.25 U5.8
RST_LAN
  Top 0.2: U$3.RST 38.23,72.13 37.19,71.09 37.19,68.08 41.82,63.46 41.82,55.24 40.97,54.4 MD1.33
RST_LORA
  Top 0.2: LORA-NICERF-V1.NRST 46.51,52.21 47.34,51.38 47.34,47.92 39.91,40.49 19.82,40.49 18.72,41.59 18.72,47.3 19.47,48.05 MD1.11
RTS
  Bottom 0.2: U$2.14 60.09,33.48 58.58,34.98 R2.1 60.15,37.43 60.76,38.04 60.76,40.07 61.7,41 64.38,41 67.11,43.73 67.11,46.25 72.68,51.82 72.68,57.97 73.96,59.25 73.96,60.82 73.3,61.48 70.37,61.48 69.49,60.6 69.49,54.11 66.79,51.42 56.08,51.42 54.47,49.8 54.47,46.34 55.56,45.24 Q1.2 57.33,45.28
RX  (via drill 0.35)
  Top 0.2: D3.- 70.25,19.06 69.96,18.77 66.63,18.77 64.94,20.46 64.94,25.98 64.19,26.74 60.55,26.74 v59.85,27.44 | v36.19,56.39 36.74,56.94 MD1.35
  Bottom 0.2: U$2.3 60.09,25.87 60.06,25.9 60.06,27.23 v59.85,27.44 54.6,27.44 52.75,29.29 42.83,29.29 41.77,30.35 41.77,47.92 36.19,53.49 v36.19,56.39
RX_DB9  (via drill 0.35)
  Top 0.2: MD1.27 39.31,46.72 v34.55,46.72
  Bottom 0.2: U5.9 20.28,42.61 24.39,46.72 v34.55,46.72
SCK_HSPI
  Top 0.2: U$3.SCLK 23.58,74.67 25.8,72.45 25.8,47.55 23.75,45.51 MD1.13
SCK_VSPI
  Top 0.2: LORA-NICERF-V1.SCK 43.24,62.37 42.56,61.7 42.56,51.55 41.61,50.59 MD1.30
SCL
  Top 0.2: R9.2 82.77,30.91 82.15,30.29 U3.6 79.4,30.32 78.14,30.32 77.67,29.84 77.67,27.74 78.3,27.1 83.17,27.1 85.17,25.11 87.28,25.11 87.83,24.56 87.83,21.6 87.25,21.02 U2.6
SDA
  Top 0.2: U3.5 79.49,29.08 82.04,29.08 83.31,27.81 R6.2 84.69,26.43 85.43,25.69 87.88,25.69 88.7,24.87 88.7,20.5 87.96,19.76 U2.5
SS_LAN_CONV
  Top 0.2: U$3.CS 17.7,72.13 16.38,73.45 16.38,77.43 17.44,78.49 32.56,78.49 32.59,78.45 32.59,46.85 33.94,45.51 MD1.26
SS_LORA
  Top 0.2: LORA-NICERF-V1.NSS 43.8,58.56 43.27,58.03 43.27,50.17 42.31,49.22 39.49,49.22 MD1.29
T2OUT  (via drill 0.35)
  Top 0.2: v21.54,20.19 21.54,18.62 22.89,17.28 33.15,17.28 36.16,14.26 43.7,14.26 46.9,11.05 J2.2
  Bottom 0.2: v21.54,20.19 21.54,22.28 U5.7
TX  (via drill 0.35)
  Top 0.2: D2.- 66.12,20.09 65.34,20.87 65.34,27.08 64.53,27.89 61.63,27.89 v61.16,27.42 | v37.7,55.67 MD1.34
  Bottom 0.2: U$2.2 61.16,25.77 v61.16,27.42 61.16,27.96 60.69,28.43 54.37,28.43 52.96,29.84 43.09,29.84 42.48,30.45 42.48,48.24 36.97,53.75 36.97,54.95 v37.7,55.67
TX_DB9  (via drill 0.35)
  Top 0.2: v37.25,48.05 MD1.28
  Bottom 0.2: 37.23,48.06 v37.25,48.05 v37.26,48.04 37.26,46.18 36.44,45.36 24.11,45.36 21.55,42.8 U5.10
USB_N
  Bottom 0.2: J3.2 65.48,6.52 64.66,7.33 64.66,14.01 63.84,14.84 60.94,14.84 59.07,16.7 59.07,21.52 56.28,24.32 U$2.6
USB_P
  Bottom 0.2: J3.3 65.06,10.25 65.06,14.18 64.01,15.24 61.11,15.24 59.47,16.87 59.47,21.69 57.55,23.62 U$2.5
VCC  (via drill 0.35)
  Top 0.2: v64.14,30.47 64.17,30.51 66.86,30.51 67.53,29.84 R4.2 70.31,28.06 R5.2 70.81,27.56 72.3,27.56 73.85,26 D5.A 73.79,24.66 73.06,24.66 72.12,23.72 72.12,19.04 70.92,17.84 67.09,17.84 66,16.75 J3.1 | v16.12,63.84 16,63.96 13.97,63.96 11.61,61.6 C4.1
  Bottom 0.2: C1.1 62.63,37.22 U$2.16 63.12,30.47 v64.14,30.47 72.68,30.47 76.51,34.31 76.51,70.88 73.08,74.31 54.75,74.31 48.3,67.87 24.42,67.87 17.74,61.19 17.74,56.71 11.3,50.27 11.3,45.8 12.08,45.02 14.59,45.02 17.45,47.87 21.08,47.87 22.12,46.83 22.12,46.14 18.92,42.94 10.52,42.94 8.66,44.8 8.66,49.8 16.07,57.21 16.07,63.78 v16.12,63.84
VCC_DB9
  Top 0.2: 27.48,14.18 27.35,14.05 D6.C 27.35,14.75 26.87,15.23 13.7,15.23 12.58,16.35 12.58,21.67 U$1.IN_VCC